# Altium PCB KDAT_PCB.PcbDoc
Units mil, origin at the board's own origin, x right, y up, seen from the top; angles counter-clockwise.
Board outline 3385 x 2285 mil, 2 copper layers (Top Layer, Bottom Layer); 26 components, 16 nets, 69 pads, 0 vias.
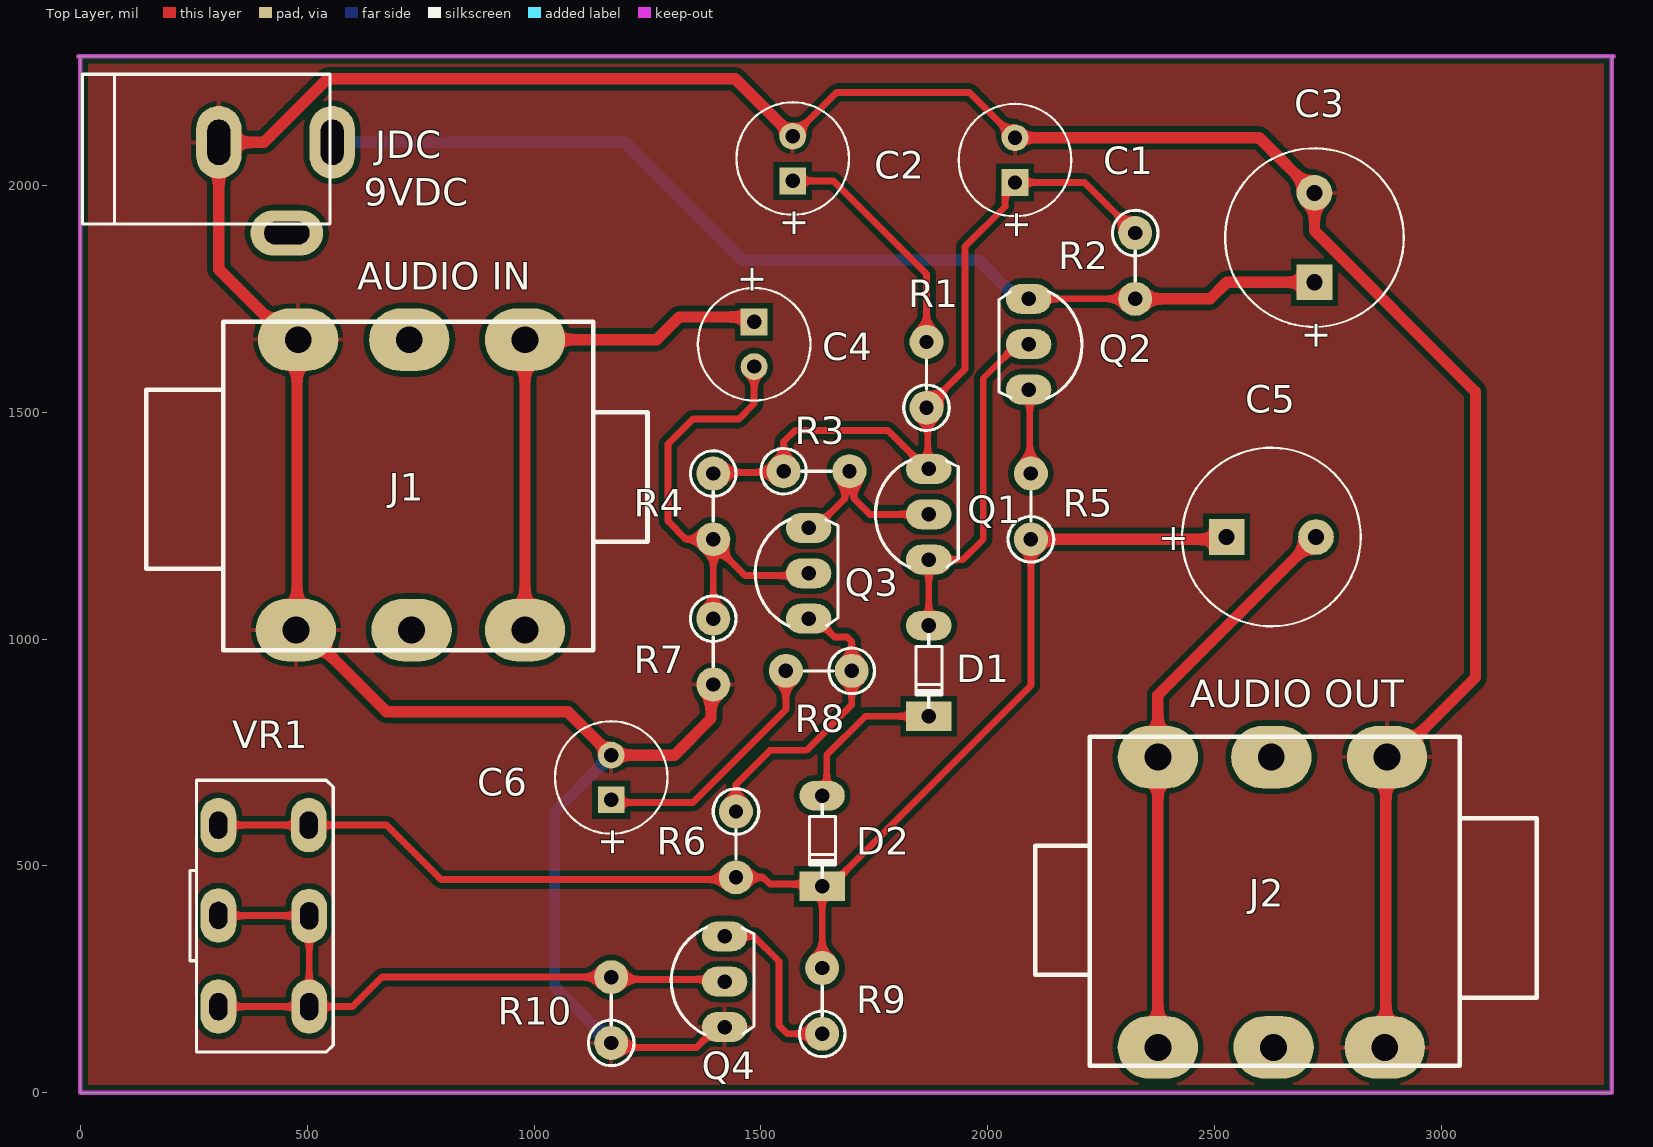
[diagram p0: Top Layer view]
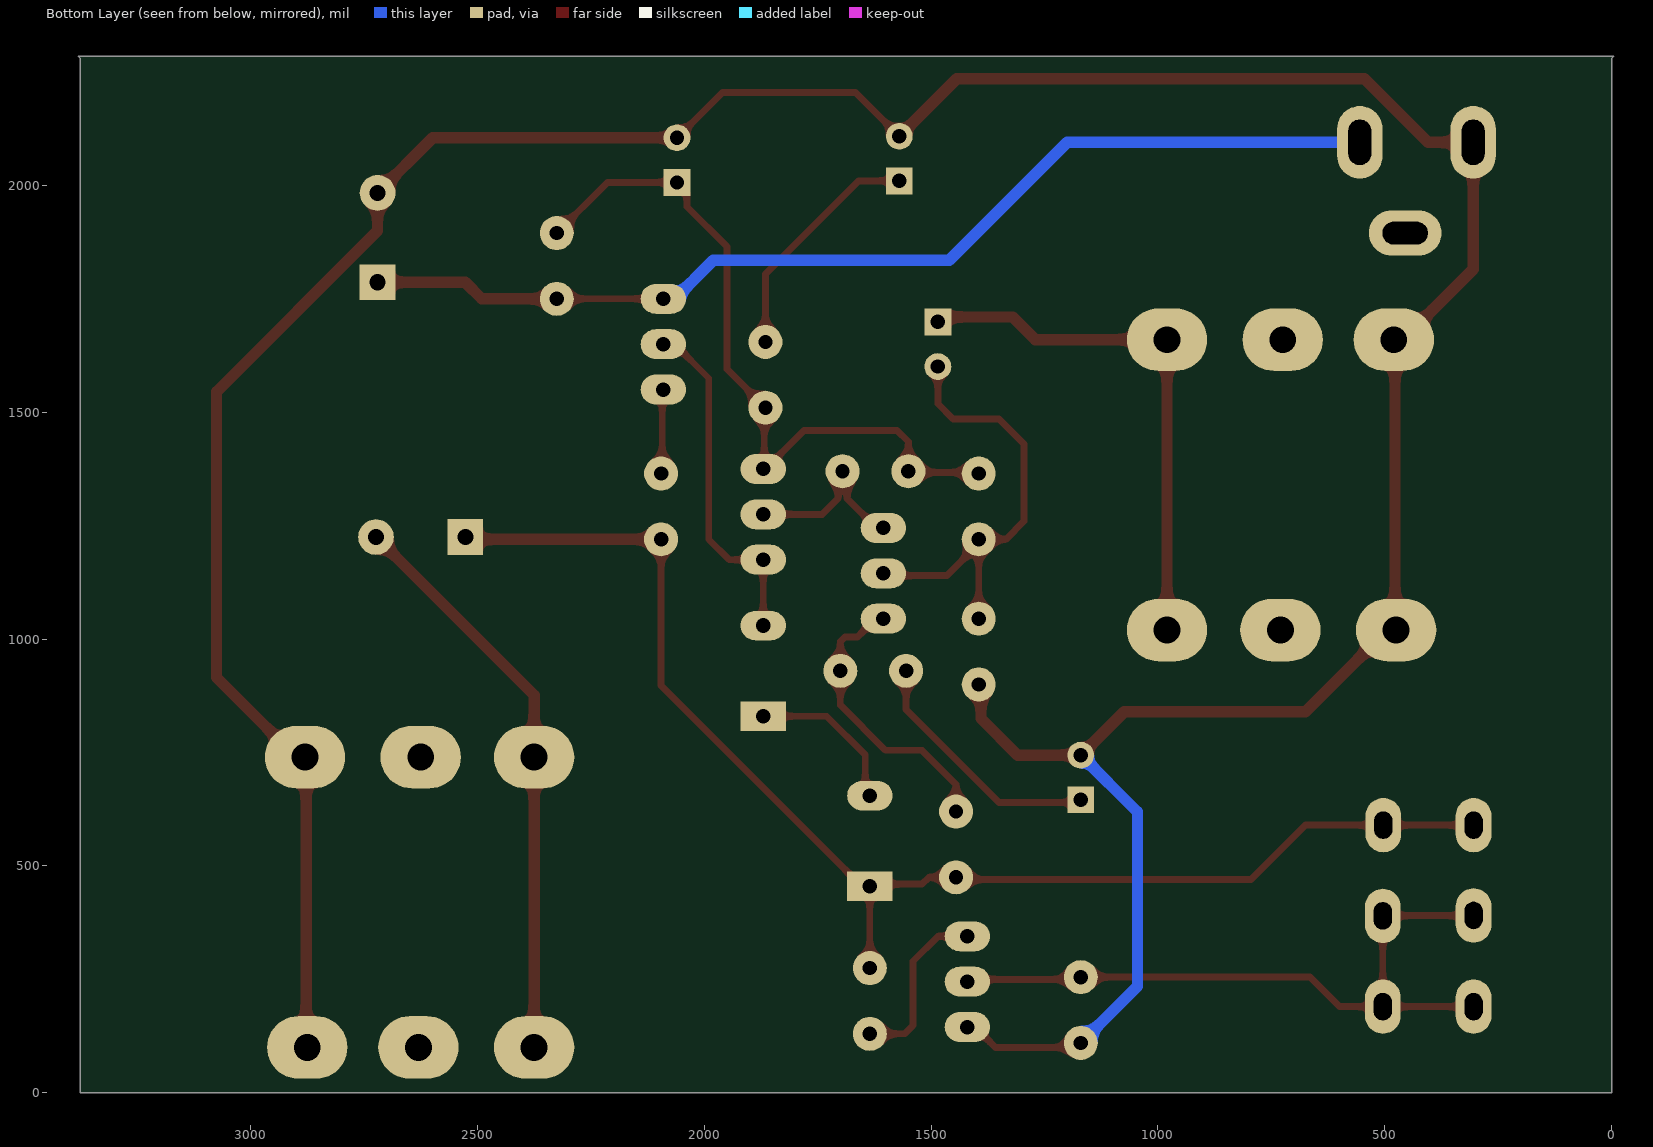
[diagram p1: Bottom Layer view, seen from below]
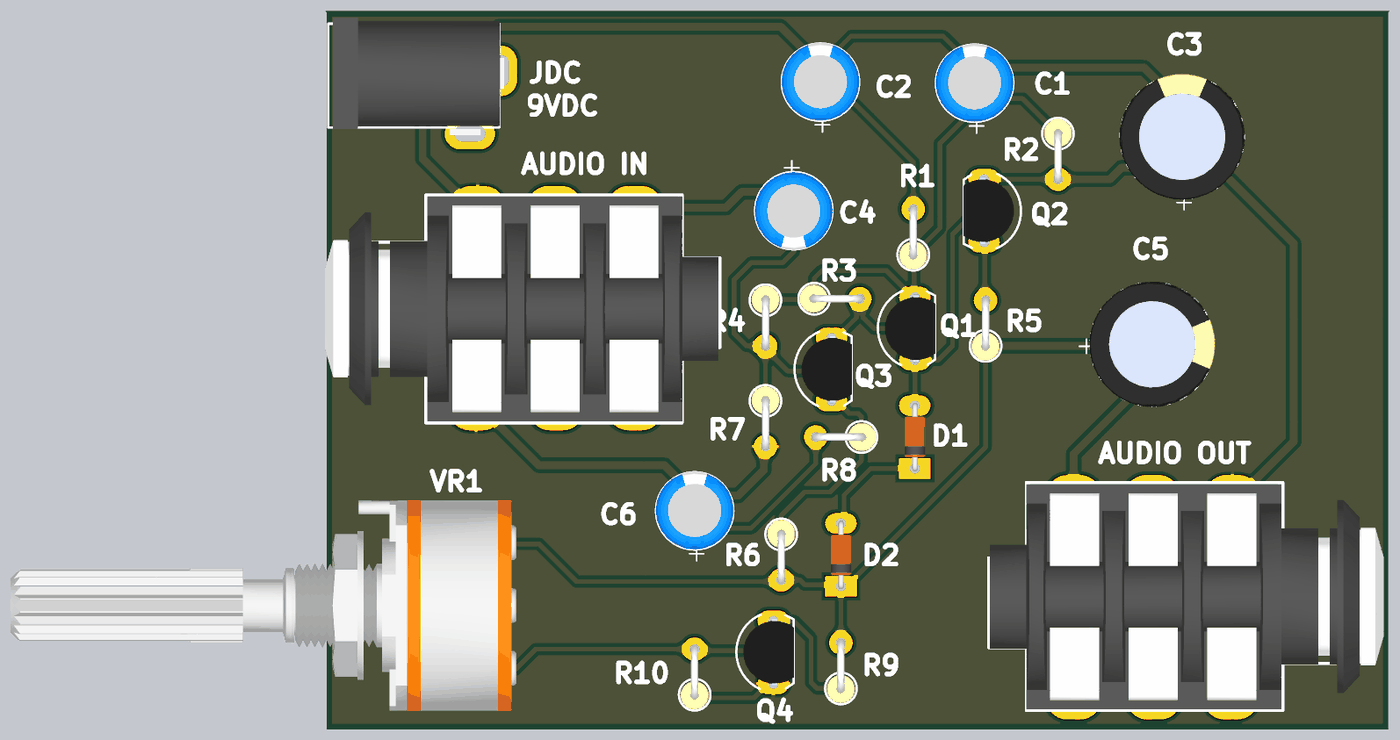
[diagram p2: 3D render of the assembled board from above, using the file's embedded part models]

## Layer stack, top to bottom
Top Solder: solder mask 0.4, Solder Resist, Dk 3.5
Top Layer: signal copper 1.4
Dielectric 1: dielectric 12.6, FR-4, Dk 4.8
Bottom Layer: signal copper 1.4
Bottom Solder: solder mask 0.4, Solder Resist, Dk 3.5

## Board outline
0,0 3375,0 3375,2280 3380,2285 -5,2285 0,2280

## Design rules (kind name [scope] priority, off if disabled: settings)
Clearance [All] p1: gap=12 ignorepadtopadclearanceinfootprint=FALSE
PolygonConnect [All] p1: connectstyle=Relief reliefconductorwidth=10 reliefentries=4 polygonreliefangle="90 Angle" airgapwidth=10
RoomDefinition KĐAT_Sch [InComponentClass('KĐAT_Sch')] p1: confinementstyle=ConfineIn formatcopy=TRUE lockcomponents=FALSE outline -1005,0 3377.5,0 3377.5,2282.5 -1005,2282.5
RoutingVias [All] p1: holewidth=0.4 width=0.8 viastyle="Through Hole" minholewidth=0.4 minwidth=0.8 maxholewidth=0.4 maxwidth=0.8
SolderMaskExpansion [All] p1: expansion=4 istentingtop=FALSE
Width [All] p1: maxlimit=30 minlimit=12 preferedwidth=15
30 further rules are at their usual default settings.

## Classes and differential pairs
component class KĐAT_Sch: C1 C2 C4 C6 D1 D2 J1 J2 JDC Q1 Q2 Q3 Q4 R1 R2 R3 R4 R5 R6 R7 R8 R9 R10 VR1

## Components (designator, comment, footprint, x,y, rotation, side; value= is the part's Value field where it differs from the comment)
C1 "220uF" CA-ALU-6.3 2060,2055.79 r90 top value=104
C2 "470uF" CA-ALU-6.3 1570,2059.21 r90 top value=104
C3 "2200uF" CA-ALU-10 2720,1885 r90 top value=104
C4 "10uF" CA-ALU-6.3 1485,1650 r270 top value=104
C5 "2200uF" CA-ALU-10 2625,1225 r0 top value=104
C6 "330uF" CA-ALU-6.3 1170,695 r90 top value=104
D1 "1N4148" DIO-0.5A-SMALL 1870,930 r90 top value=1N5007
D2 "1N4148" DIO-0.5A-SMALL 1635,555 r90 top value=1N5007
J1 "AUDIO MIC BLACK HEADER" "CON MIC2" 485,1225 r0 top
J2 "AUDIO MIC BLACK HEADER" "CON MIC2" 2870,535 r180 top
JDC "Jac DC" DC0 430,1995 r0 top
Q1 "C828" TO92-123 1870,1275 r90 top value=C1815
Q2 "A564" TO92-123 2090,1650 r270 top value=A1015
Q3 "C828" TO92-123 1605,1145 r90 top value=C1815
Q4 "C828" TO92-123 1420,245 r90 top value=C1815
R1 "27K" RES-1/4WD 1865,1575 r90 top
R2 "330" RES-1/4WD 2325,1830 r270 top
R3 "15K" RES-1/4WD 1615,1370 r0 top
R4 "27K" RES-1/4WD 1395,1300 r270 top
R5 "1" RES-1/4WD 2095,1285 r90 top
R6 "22K" RES-1/4WD 1445,555 r270 top
R7 "100K" RES-1/4WD 1395,980 r270 top
R8 "1K" RES-1/4WD 1635,930 r180 top
R9 "1" RES-1/4WD 1635,195 r90 top
R10 "470" RES-1/4WD 1170,175 r90 top
VR1 "470" VR-D1 304.27,390 r270 top value="Volume Dual 50K"

## Footprints (in the part's own frame and the unit in brackets; to place one, negate y for a bottom-side part, rotate by r counter-clockwise, add the part's x,y. Pads: shape width x height; smd on the part's side, far side on the other; paste and mask are expansions set on the pad)
CA-ALU-6.3 [mm] "Polarized capacitors, Aluminum Electrolytic Capacitors, 2-Leads, Body 6.3x15x2.5x0.5"
  rect 1.5x1.5 hole 0.8: 1(-1.25,0)
  round 1.5 hole 0.8: 2(1.25,0)
  silkscreen extent -3.15,-3.15 3.15,3.15, body extent -3.12,-3.15 3.18,3.15, height 11
CA-ALU-10 [mm] "Polarized capacitors, Aluminum Electrolytic Capacitors, 2-Leads, Body 10x20x5x0.6"
  rect 2x2 hole 0.9: 1(-2.5,0)
  round 2 hole 0.9: 2(2.5,0)
  silkscreen extent -5,-5 5,5, body extent -5.08,-5.08 5.08,5.08, height 20.52
"CON MIC2" [mm]
  oval 4.5x3.5 hole 1.5: 1(-0.254,-5.207) 1(-0.127,11.049) 2(6.096,11.049) 2(6.223,-5.207) 3(12.573,-5.207) 3(12.573,11.049)
  silkscreen extent -8.64,-6.35 19.43,12.06, body extent -12.47,-6.23 19.33,11.97, height 16.3
DC0 [mil] "Jac DC input"
  oval 100x160 hole 50 slot 100 at 90 deg: 1(125,100) 2(-125,100)
  oval 160x100 hole 50 slot 100 at 0 deg: 3(25,-100)
  silkscreen extent -425,-80 120,250, body extent -410,-105 134,269, height 434
DIO-0.5A-SMALL [mil] "Diode muoi, W 80mil, L 300mil"
  oval 65x100 hole 32: 1(100,0)
  rect 65x100 hole 32: 2(-100,0)
  silkscreen extent -80,-30 80,28, body extent -108,-33 108,32, height 61
RES-1/4WD [mil]
  round 75 hole 31.5: 1(-65,0) 2(80,0)
  silkscreen extent -115,-50 40,50, body extent -112,-45 92,46, height 379
TO92-123 [mil] "TO-92"
  oval 66x100 hole 32: 1(-100,0) 2(0,0) 3(100,0)
  silkscreen extent -117,-65 120,118, body extent -109,-66 109,95, height 245
VR-D1 [mil] "Volume control Dual"
  oval 120x78.74 hole 40 slot 60 at 0 deg: 1(-200,0) 2(-1,0) 3(200,0) 4(-200,199) 5(0,200) 6(200,200)
  silkscreen extent -299,-63 300,253, body extent -339,-1309 331,299, height 835

## Part data
C1 C2 C3 C4 C5 C6: library part CN-ALU-DIP, "Capacitor (Semiconductor SIM Model)", LatestRevisionDate=17-Jul-2002, LatestRevisionNote="Re-released for DXP Platform.", PackageReference=C1206, Publisher="Altium Limited"
D1 D2: library part Diode, "Default Diode", Code - JEDEC=DO-214-AB, Published=8-Jun-2000, Publisher="Altium Limited", Revision="July-2002: Re-released for DXP Platform."
J1 J2: library part "CON MIC2", "Connector, 3.5mm Stereo Audio Socket, Black, 2 break contacts (normals) and 2 auxiliary make contacts", Category=Connector, Connector type="AUDIO BLACK HEADER", Status=Production
JDC: library part DCIN, "Jac DC input"
Q1 Q3 Q4: library part 2N222, "NPN 600mW, ECB"
Q2: library part 2N3906, "PNP 600mW, ECB"
R1 R2 R3 R4 R5 R6 R7 R8 R9 R10: library part Res, "Res", Manufacturer="Generic Components", Class=Passive, Published=08/06/2000, Publisher="Altium Hobart Technology Centre", SubClass=R
VR1: library part VR-D, "Volume control Dual"

## Nets (pads, with @x,y where several pads share a name; then routed paths per layer and width w, separated by ;. In a path a pad name is that pad's centre, name@x,y a point inside that pad or via, vN(x,y) a via of type N, cw(c..) or ccw(c..) an arc to the next point about the centre after c; other vN are vias at no path point)
GND: C1.2 C2.2 C3.2 C6.2 J1.1 J2.1 JDC.2 Q4.1 R7.2 R10.1 | length 8100.2
  Top Layer w15: R10.1 1180,100 1358,100 1403,145 Q4.1 ; C2.2 1570,2120 1581.57,2120 1666.57,2205 1960,2205 C1.2
  Top Layer w25: R7.2 1390,895 1390,825 1309.21,744.21 C6.2 1074.21,840 674.68,840 494.68,1020 475,1020 477.5,1022.5 477.5,1657.5 480,1660 460.32,1660 305,1815.31 JDC.2 404.82,2095 544.82,2235 1443.43,2235 C2.2 ; C1.2 2598.43,2105 C3.2 2720,1899.96 3075,1544.96 3075,915.32 2899.68,740 2880,740 2877.5,737.5 2877.5,102.5 J2.1@2875,100
  Bottom Layer w25: R10.1 1045,235 1045,619.21 C6.2
NetC1_1: C1.1 Q1.3 R1.1 R2.1 R3.1 R4.1 | length 1618.3
  Top Layer w15: R4.1 1397.5,1367.5 1547.5,1367.5 R3.1 1550,1435 1575,1460 1780,1460 1865,1375 Q1.3 1867.5,1377.5 1867.5,1507.5 R1.1 1950,1595 1950,1865 2037.97,1952.97 2037.97,1984.55 C1.1 2213.43,2006.57 R2.1
  Bottom Layer w15: R3.1 R3.1@1550,1375
NetC2_1: C2.1 R1.2 | length 529.9
  Top Layer w15: C2.1 1660,2010 1865,1805 R1.2
NetC3_1: C3.1 JDC.1 Q2.1 R2.2 | length 2335
  Top Layer w15: Q2.1 R2.2 ; C3.1@2711.57,1795 C3.1
  Top Layer w25: R2.2 2490,1750 2526.57,1786.57 C3.1
  Bottom Layer w25: JDC.1 1200,2095 1460,1835 1980,1835 2065,1750 Q2.1
NetC4_1: C4.1 J1.3 | length 1170.2
  Top Layer w25: J1.3@980,1020 980,1660 1270,1660 1320,1710 1474.21,1710 C4.1
NetC4_2: C4.2 Q3.2 R4.2 R7.1 | length 1011.4
  Top Layer w15: R7.1 R4.2@1395,1210 ; C4.2 1485,1518.79 1451.21,1485 1350,1485 1295,1430 1295,1260 1335,1220 R4.2 R4.2@1395,1210 ; Q3.2 1600,1140 1465,1140 R4.2@1395,1210
NetC5_1: C5.1 D2.2 R5.1 R6.2 R9.2 VR1.1 VR1.4 | length 2970.2
  Top Layer w15: VR1.1 VR1.4 675,590 795,470 1440,470 R6.2 1505,475 1520,460 1630,460 D2.2 ; R9.2 D2.2 ; R5.1 2095,897.5 1652.5,455 D2.2
  Top Layer w25: R5.1 2521.57,1220 C5.1
NetC5_2: C5.2 J2.3 | length 1269.3
  Top Layer w25: J2.3@2375,100 2375,740 2375,876.57 C5.2
NetC6_1: C6.1 R8.2 | length 557.3
  Top Layer w15: C6.1 1175.79,640 1350,640 1555,845 R8.2
NetD1_1: D1.1 Q1.1 Q2.2 | length 769.7
  Top Layer w15: D1.1 Q1.1 1945,1175 1990,1220 1990,1575 2065,1650 Q2.2
NetD1_2: D1.2 D2.1 | length 354.4
  Top Layer w15: D2.1 1645,665 1645,745 1730,830 D1.2
NetQ1_2: Q1.2 Q3.3 R3.2 | length 460.5
  Top Layer w15: Q3.3 1620,1245 1685,1310 1685,1360 R3.2 1705,1360 1705,1310 1740,1275 Q1.2@1885,1275
  Bottom Layer w15: Q3.3 Q3.3@1635.8,1245
NetQ2_3: Q2.3 R5.2 | length 187.1
  Top Layer w15: Q2.3 2092.5,1547.5 2092.5,1367.5 R5.2
NetQ3_1: Q3.1 R6.1 R8.1 | length 643.2
  Top Layer w15: R6.1 1445,680 1520,755 1600,755 1700,855 R8.1 1700,995 1690,1005 1662,1005 1622,1045 Q3.1
NetQ4_2: Q4.2 R10.2 VR1.2 VR1.3 VR1.5 VR1.6 | length 1547.2
  Top Layer w15: VR1.3 VR1.6 ; VR1.2 304.77,390.5 503.77,390.5 VR1.5 VR1.6 ; Q4.2 1415,250 1175,250 R10.2 665,255 600,190 VR1.6
NetQ4_3: Q4.3 R9.1 | length 386.8
  Top Layer w15: Q4.3 1485,345 1540,290 1540,148.79 1558.79,130 R9.1
pads on no net: J1.2 J2.2 JDC.3

## Polygon pours and split planes (outlines as drawn)
GND on Top Layer "GND_L01_P001" (solid, remove dead copper, pour order 1): 1.2,2280 3373.8,2280 3373.8,0 -1.2,0

## Keep-outs
Top Layer:
  the board outline again, w10

## Silkscreen, mask and mechanical layers (free items; w line width, h text height)
Top Overlay:
  text "9VDC" at 625,1955 h60
  text "AUDIO IN" at 610,1770 h60
  text "AUDIO OUT" at 2445,850 h60

## Text inside footprints (layer, text, board x,y; h text height)
C1: Top Overlay "+" at 2089.02,1879.61 h59.06 r90
C2: Top Overlay "+" at 1599.02,1883.03 h59.06 r90
C3: Top Overlay "+" at 2749.02,1635.98 h59.06 r90
C4: Top Overlay "+" at 1455.98,1826.18 h59.06 r270
C5: Top Overlay "+" at 2375.98,1195.98 h59.06
C6: Top Overlay "+" at 1199.02,518.82 h59.06 r90